# Allegro board PROIECT_TIE_DETECTOR_DE_CUTREMUR.brd
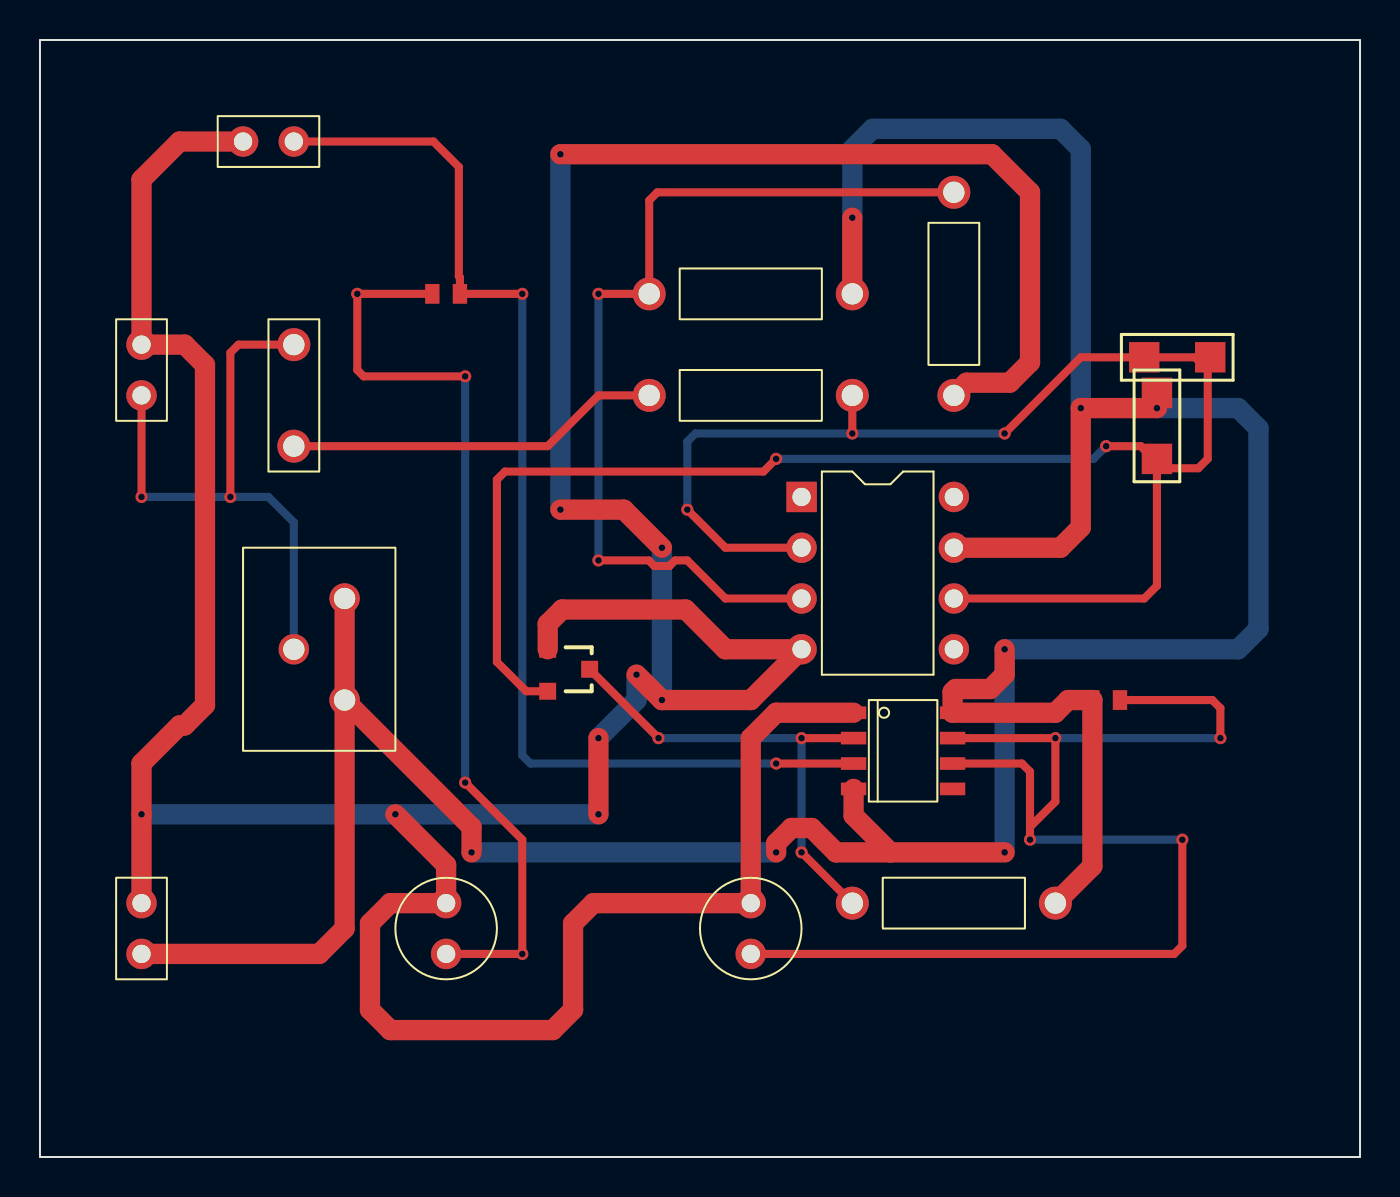
[diagram p0: board, top side]
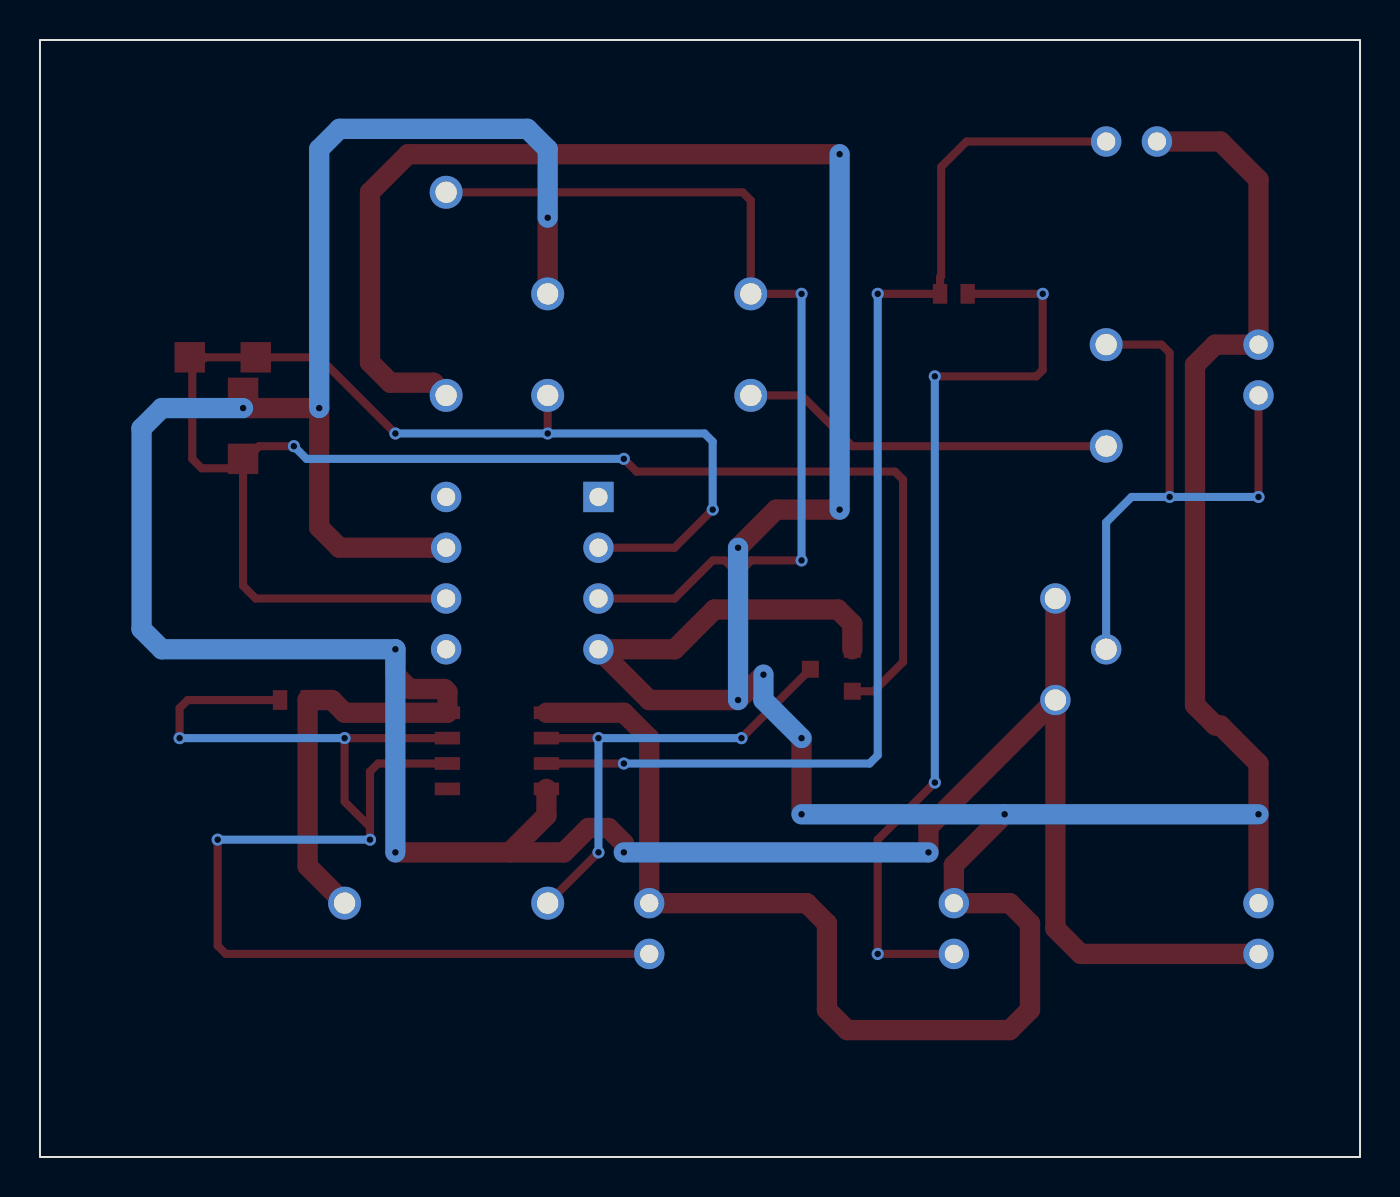
[diagram p1: board, bottom side, seen from below]

Outline 66.04 x 55.88 mm; copper layers: TOP, BOTTOM. Coordinates in mm from the lower left corner of the outline.
Outline path: rectangle 0,0 66.04,55.88

## Design rules (mm)
nets with their own width: min track width 0.406; nets N00855 N00880 N00920 N00981 N01004 N01012 N01016 N01043 N01268 N01306
nets with their own width: min track width 1.016; nets +9V GND

## Placement (name value [footprint] x y rotation side)
C1  220nF  [CAPCK06]  12.7 35.56 0 top
C2  100uF/16V  [CAP196]  35.56 10.16 0 top
D1  LED  [CAP196]  20.32 10.16 0 top
IC2  NE555  [SOIC8]  43.18 20.32 0 top
J1  CON2  [JUMPER2]  5.08 12.7 270 top
PZ1  buzzer  [JUMPER2]  12.7 50.8 180 top
R1  12k  [RES400]  30.48 38.1 270 top
R2  12k  [RES400]  40.64 43.18 90 top
R3  4.7k  [RES400]  45.72 48.26 180 top
R4  1M  [SMR1206]  55.25 40.01 0 top
R5  150k  [SMR1206]  55.88 34.93 90 top
R6  1k  [RES400]  50.8 12.7 90 top
R7  100ohm  [RES1608X50N_0603]  20.32 43.18 180 top
R8  100k  [RES1608X50N_0603]  53.34 22.86 0 top
T1  BC548  [SOT23_3]  25.4 25.4 270 top
U2  piezo element  [JUMPER2]  5.08 38.1 90 top
U3  LM741  [DIP8_3]  38.1 33.02 0 top
VR1  10k  [POT]  15.24 22.86 90 top

## Library data of the parts
C1 = CAP NP: Tolerance: ***; User Part Number: ***
C2 = CAP POL: Tolerance: ***; User Part Number: ***
D1 = LED: Tolerance: ***; User Part Number: ***
IC2 = NE555_4: Tolerance: ***; User Part Number: ***
J1 = CON2: User Part Number: ***
PZ1 = PIEZO BUZZER_0: User Part Number: ***
R1-R3 R6 = R: Tolerance: ***; User Part Number: ***
R4 R5 R7 R8 = R
T1 = BC548
U2 = piezo element: User Part Number: ***
U3 = LM741_2: Tolerance: ***; User Part Number: ***
VR1 = POT: User Part Number: ***

## Footprints (pads in the part's own frame, mm; a bottom-side part is the same pattern mirrored in y, then rotated)
CAP196
  round 1.524 hole 0.914: 1(0,0) 2(0,2.54)
CAPCK06
  round 1.651 hole 1.067: 1(0,0) 2(0,5.08)
DIP8_3
  rect 1.524x1.524 hole 0.914: 1(0,0)
  round 1.524 hole 0.914: 2(0,-2.54) 3(0,-5.08) 4(0,-7.62) 5(7.62,-7.62) 6(7.62,-5.08) 7(7.62,-2.54) 8(7.62,0)
JUMPER2
  round 1.524 hole 0.914: 1(0,0) 2(2.54,0)
POT
  round 1.524 hole 1.067: 1(0,0) 2(5.08,0) 3(2.54,2.54)
RES400
  round 1.651 hole 1.067: 1(0,0) 2(0,10.16)
RES1608X50N_0603
  rect 0.72x0.99 smd: 1(-0.69,0) 2(0.69,0)
SMR1206
  rect 1.524x1.524 smd: 1(0,0) 2(3.302,0)
SOIC8
  rect 1.27x0.635 smd: 1(-2.477,1.905) 2(-2.477,0.635) 3(-2.477,-0.635) 4(-2.477,-1.905) 5(2.477,-1.905) 6(2.477,-0.635) 7(2.477,0.635) 8(2.477,1.905)
SOT23_3
  rect 0.85x0.85 smd: 1(0,0) 2(2.1,0) 3(1,2.1)

## Nets
+9V: IC2.4 IC2.8(VCC) J1.2 R2.1 R6.1 R8.1 U3.7 VR1.1 VR1.2(WIPER)
GND: C2.2 D1.2(CATHODE) IC2.1 J1.1 PZ1.2(-) R3.2 T1.1(EMITTER) U2.2(PIN2) U3.4(V-)
N00855: R2.2 R3.1 U3.3
N00880: C1.2 U2.1 VR1.3
N00920: C2.1 IC2.6 IC2.7 R8.2
N00981: IC2.2 R6.2 T1.3
N01004: R5.2 T1.2
N01012: R4.2 R5.1 U3.6
N01016: R1.2 R4.1 U3.2
N01043: C1.1 R1.1
N01268: IC2.3 PZ1.1 R7.1
N01306: D1.1 R7.2

Pads without a net: IC2 5; U3 1 5 8

## Via types
v1: diameter 0.61, hole 0.33, TOP to BOTTOM, 38 vias

## Routing (per net, layer and track width the routed paths; a pad name or vN(x,y) marks a point on that pad's centre or on a via; arc(x,y) is an arc through that point)
+9V: length 180.6
  TOP w1.016: v1(55.88,37.47) v1(52.07,37.47) 52.07,31.5 51.05,30.48 U3.7 ; VR1.1 15.24,11.43 13.97,10.16 J1.2 ; VR1.1 21.59,16.51 v1(21.59,15.24) ; VR1.1 VR1.2 ; 42.55,15.24 v1(48.26,15.24) ; 42.55,15.24 40.7,17.08 IC2.4 ; 42.55,15.24 39.82,15.24 38.61,16.46 37.59,16.46 36.83,15.69 v1(36.83,15.24) ; R2.1 v1(40.64,46.99) ; R6.1 52.65,14.55 R8.1 51.44,22.86 50.8,22.23 IC2.8 45.66,23.26 45.8,23.41 47.54,23.41 48.26,24.13 v1(48.26,25.4)
  BOTTOM w1.016: v1(52.07,37.47) 52.07,50.42 51.05,51.44 41.66,51.44 40.64,50.42 v1(40.64,46.99) ; v1(21.59,15.24) v1(36.83,15.24) ; v1(48.26,15.24) v1(48.26,25.4) 59.94,25.4 60.96,26.42 60.96,36.45 59.94,37.47 v1(55.88,37.47)
GND: length 222.8
  TOP w1.016: R3.2 46.35,38.74 48.51,38.74 49.53,39.75 49.53,48.26 47.62,50.17 v1(26.03,50.17) ; T1.1 25.4,26.67 26.12,27.39 32.3,27.39 34.29,25.4 U3.4 35.56,22.86 v1(31.12,22.86) v1(29.84,24.13) ; IC2.1 36.83,22.23 35.56,20.96 C2.2 27.69,12.7 26.67,11.68 26.67,7.37 25.65,6.35 17.53,6.35 16.51,7.37 16.51,11.68 17.53,12.7 D1.2 20.32,14.61 v1(17.78,17.15) ; J1.1 v1(5.08,17.15) 5.08,19.69 6.99,21.59 7.24,21.59 8.25,22.61 8.25,39.62 7.24,40.64 U2.2 5.08,48.9 6.99,50.8 PZ1.2 ; v1(31.12,30.48) 29.21,32.39 v1(26.03,32.39) ; v1(27.94,20.96) v1(27.94,17.15)
  BOTTOM w1.016: v1(26.03,32.39) v1(26.03,50.17) ; v1(31.12,22.86) v1(31.12,30.48) ; v1(5.08,17.15) v1(17.78,17.15) v1(27.94,17.15) ; v1(29.84,24.13) 29.84,22.86 v1(27.94,20.96)
N00855: length 47.1
  TOP w0.406: v1(27.94,43.18) R2.2 30.48,47.85 30.89,48.26 R3.1 ; v1(27.94,29.84) 30.46,29.84 30.74,29.57 31.49,29.57 31.77,29.84 32.38,29.84 34.29,27.94 U3.3
  BOTTOM w0.406: v1(27.94,29.84) v1(27.94,43.18)
N00880: length 30.1
  TOP w0.406: C1.2 9.93,40.64 9.53,40.23 v1(9.53,33.02) ; U2.1 v1(5.08,33.02)
  BOTTOM w0.406: VR1.3 12.7,31.75 11.43,33.02 v1(9.53,33.02) v1(5.08,33.02)
N00920: length 67.2
  TOP w0.406: C2.1 56.74,10.16 57.15,10.57 v1(57.15,15.88) ; 45.66,19.69 49.12,19.69 49.53,19.28 49.53,16.51 ; v1(49.53,15.88) 49.53,16.51 ; 49.53,16.51 50.8,17.78 v1(50.8,20.96) IC2.7 ; R8.2 58.65,22.86 59.05,22.45 v1(59.05,20.96)
  BOTTOM w0.406: v1(57.15,15.88) v1(49.53,15.88) ; v1(59.05,20.96) v1(50.8,20.96)
N00981: length 23.9
  TOP w0.406: R6.2 v1(38.1,15.24) ; T1.3 v1(30.95,20.96) ; v1(38.1,20.96) IC2.2
  BOTTOM w0.406: v1(30.95,20.96) v1(38.1,20.96) v1(38.1,15.24)
N01004: length 46
  TOP w0.406: v1(53.34,35.56) 55.07,35.56 55.24,35.39 55.88,35.39 ; v1(36.83,34.93) 36.19,34.29 23.27,34.29 22.86,33.88 22.86,24.77 24.33,23.3 T1.2
  BOTTOM w0.406: v1(36.83,34.93) 52.71,34.93 v1(53.34,35.56)
N01012: length 26.5
  TOP w0.406: 55.71,40.01 57.78,40.01 58.42,39.37 58.42,34.93 57.95,34.46 55.88,34.46 55.88,28.58 55.25,27.94 U3.6
N01016: length 35.9
  TOP w0.406: v1(48.26,36.2) 52.07,40.01 54.78,40.01 ; v1(32.38,32.39) 34.29,30.48 U3.2 ; v1(40.64,36.2) R1.2
  BOTTOM w0.406: v1(32.38,32.39) 32.38,35.79 32.79,36.2 v1(40.64,36.2) v1(48.26,36.2)
N01043: length 18.8
  TOP w0.406: R1.1 27.94,38.1 25.4,35.56 C1.1
N01268: length 58.1
  TOP w0.406: v1(36.83,19.69) 40.7,19.69 ; v1(24.13,43.18) R7.1 21.01,44.01 20.96,44.06 20.96,49.53 19.69,50.8 PZ1.1
  BOTTOM w0.406: v1(24.13,43.18) 24.13,20.09 24.54,19.69 v1(36.83,19.69)
N01306: length 47
  TOP w0.406: D1.1 v1(24.13,10.16) 24.13,15.88 v1(21.27,18.73) ; v1(21.27,39.05) 16.19,39.05 15.88,39.37 v1(15.88,43.18) R7.2
  BOTTOM w0.406: v1(21.27,18.73) v1(21.27,39.05)
